# Altium PCB CON_REVD.PcbDoc
Units mm, origin at the board's own origin, x right, y up, seen from the top; angles counter-clockwise.
Board outline 95.88 x 101.01 mm, 2 copper layers (Top Layer, Bottom Layer), stack 1.556 mm thick; 4 components, 58 nets, 96 pads, 19 vias.
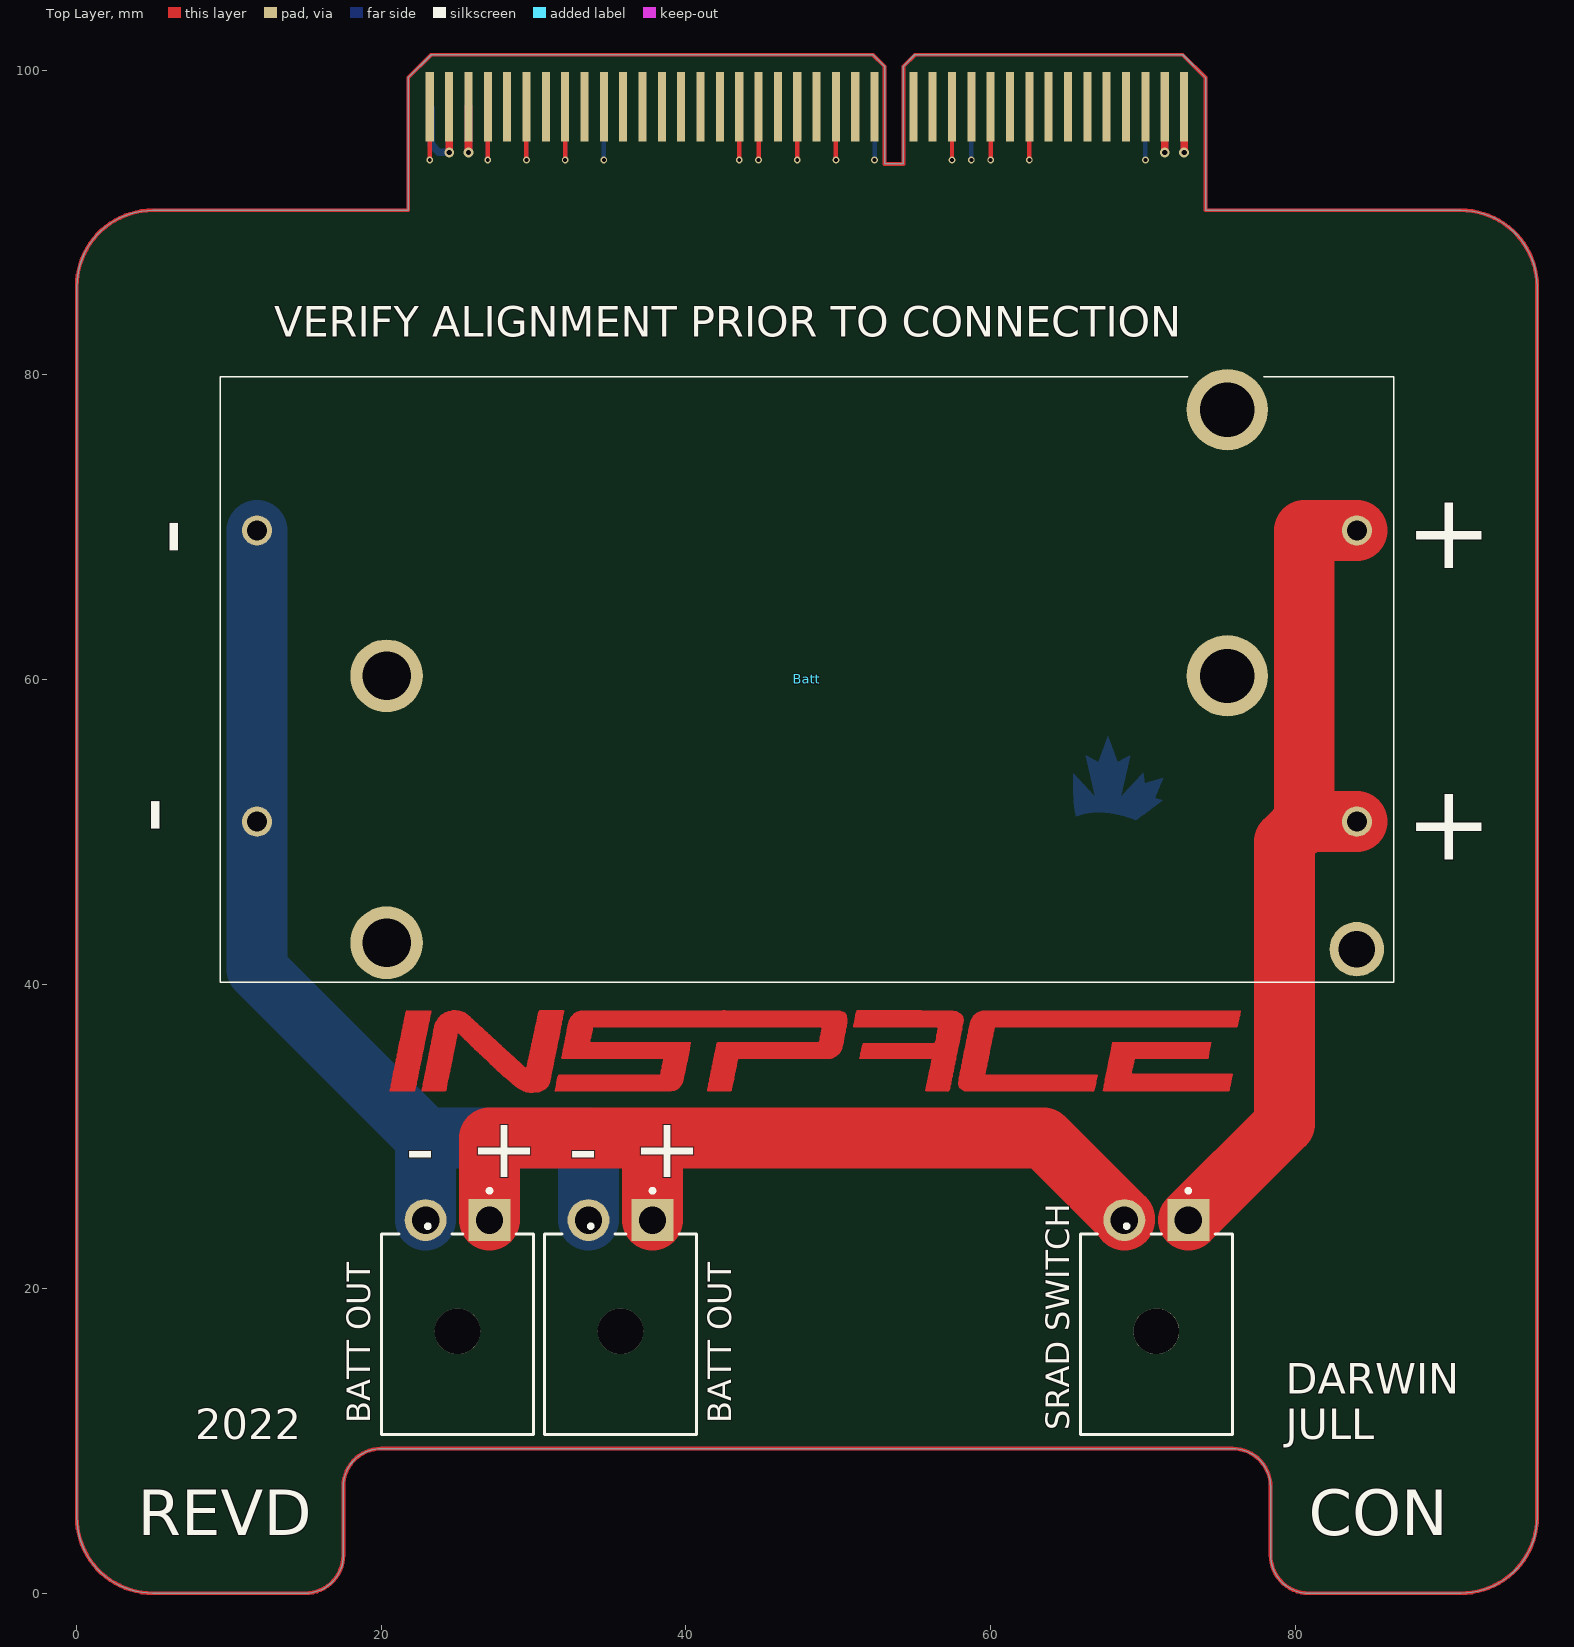
[diagram p0: Top Layer view]
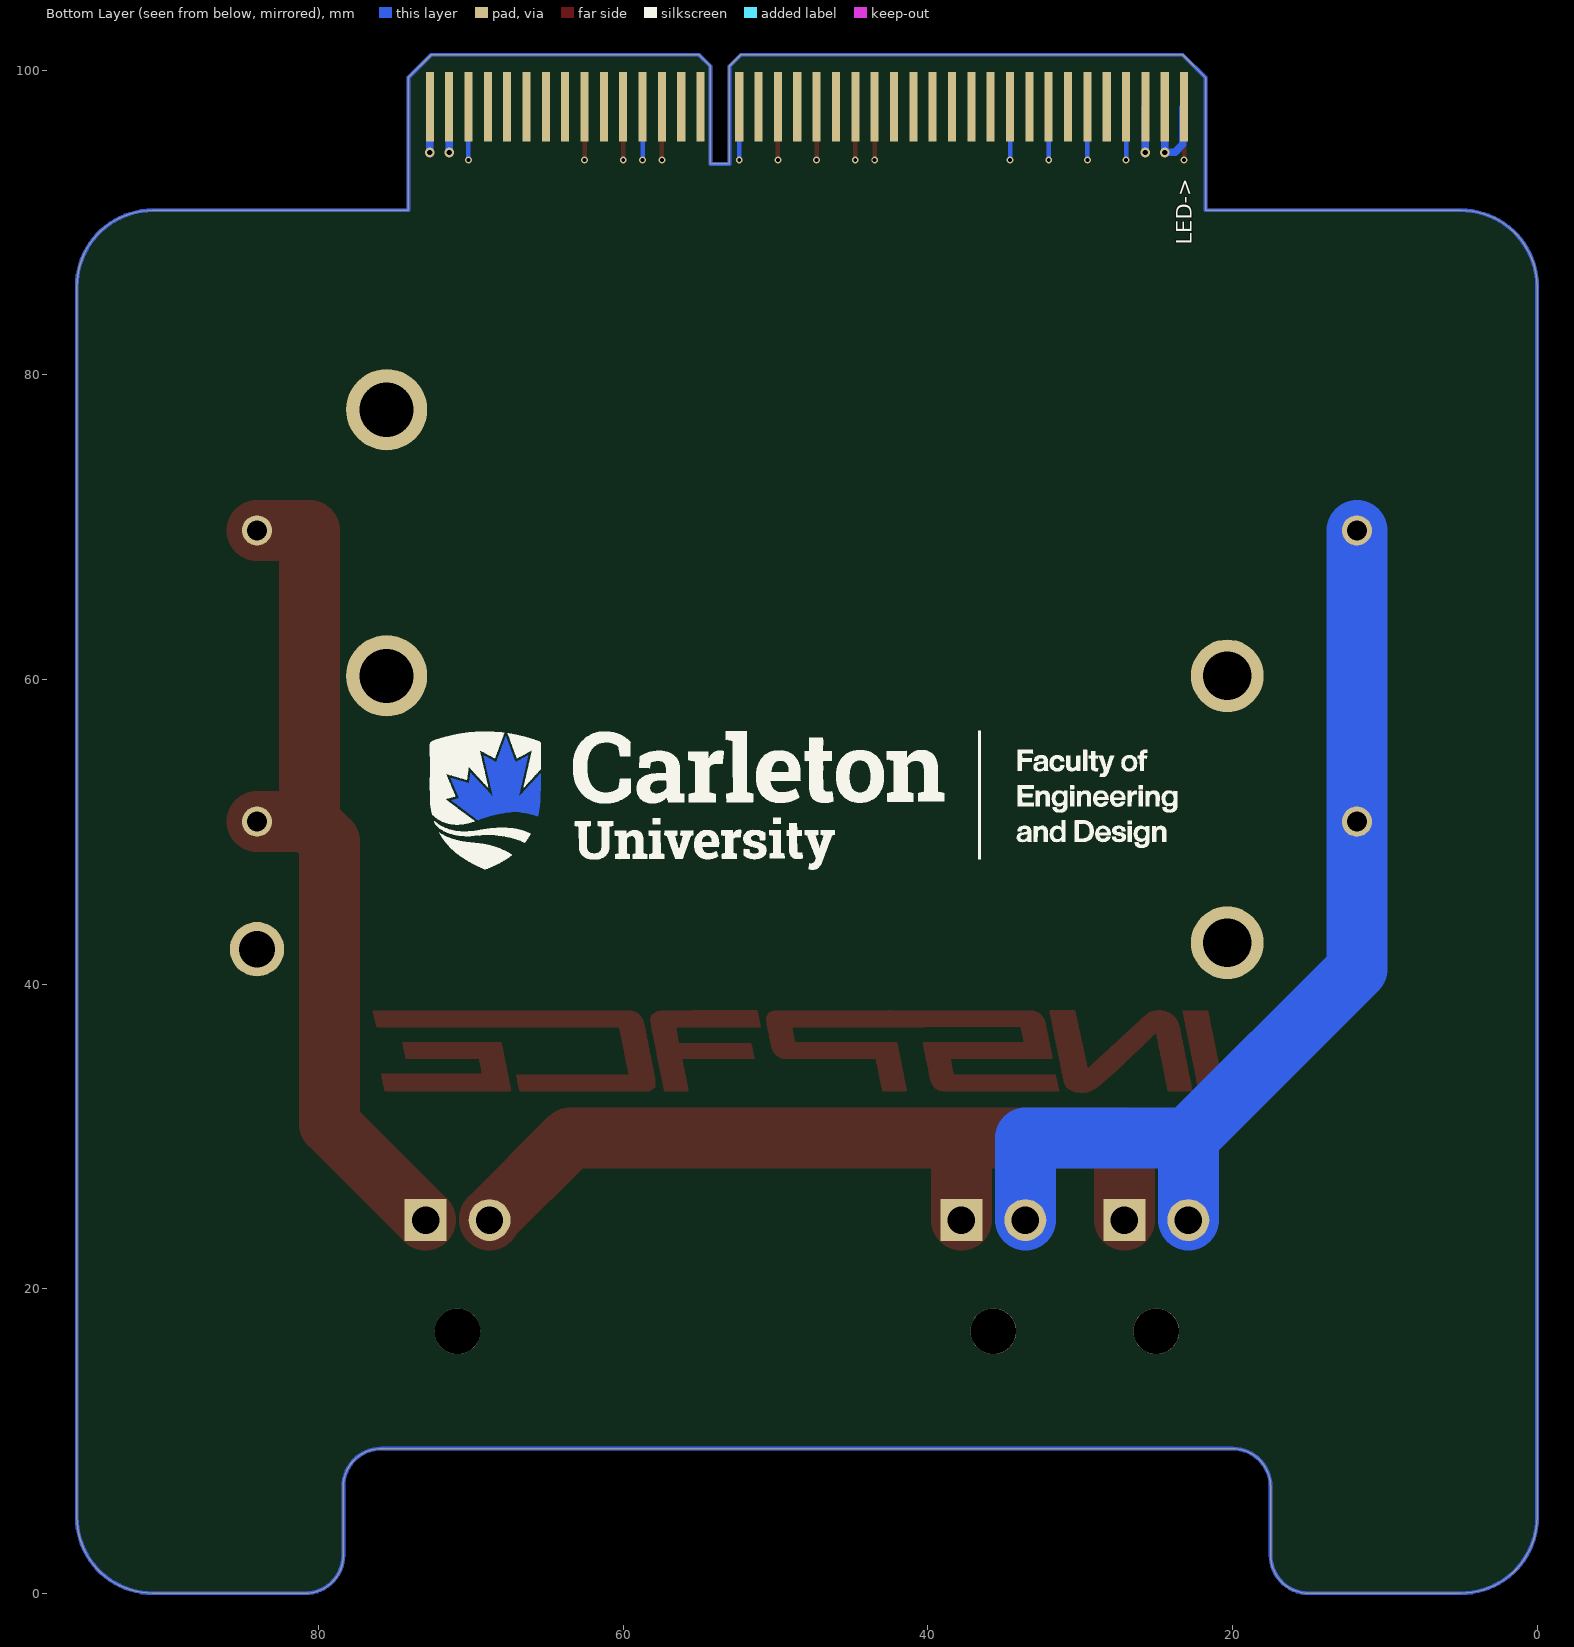
[diagram p1: Bottom Layer view, seen from below]
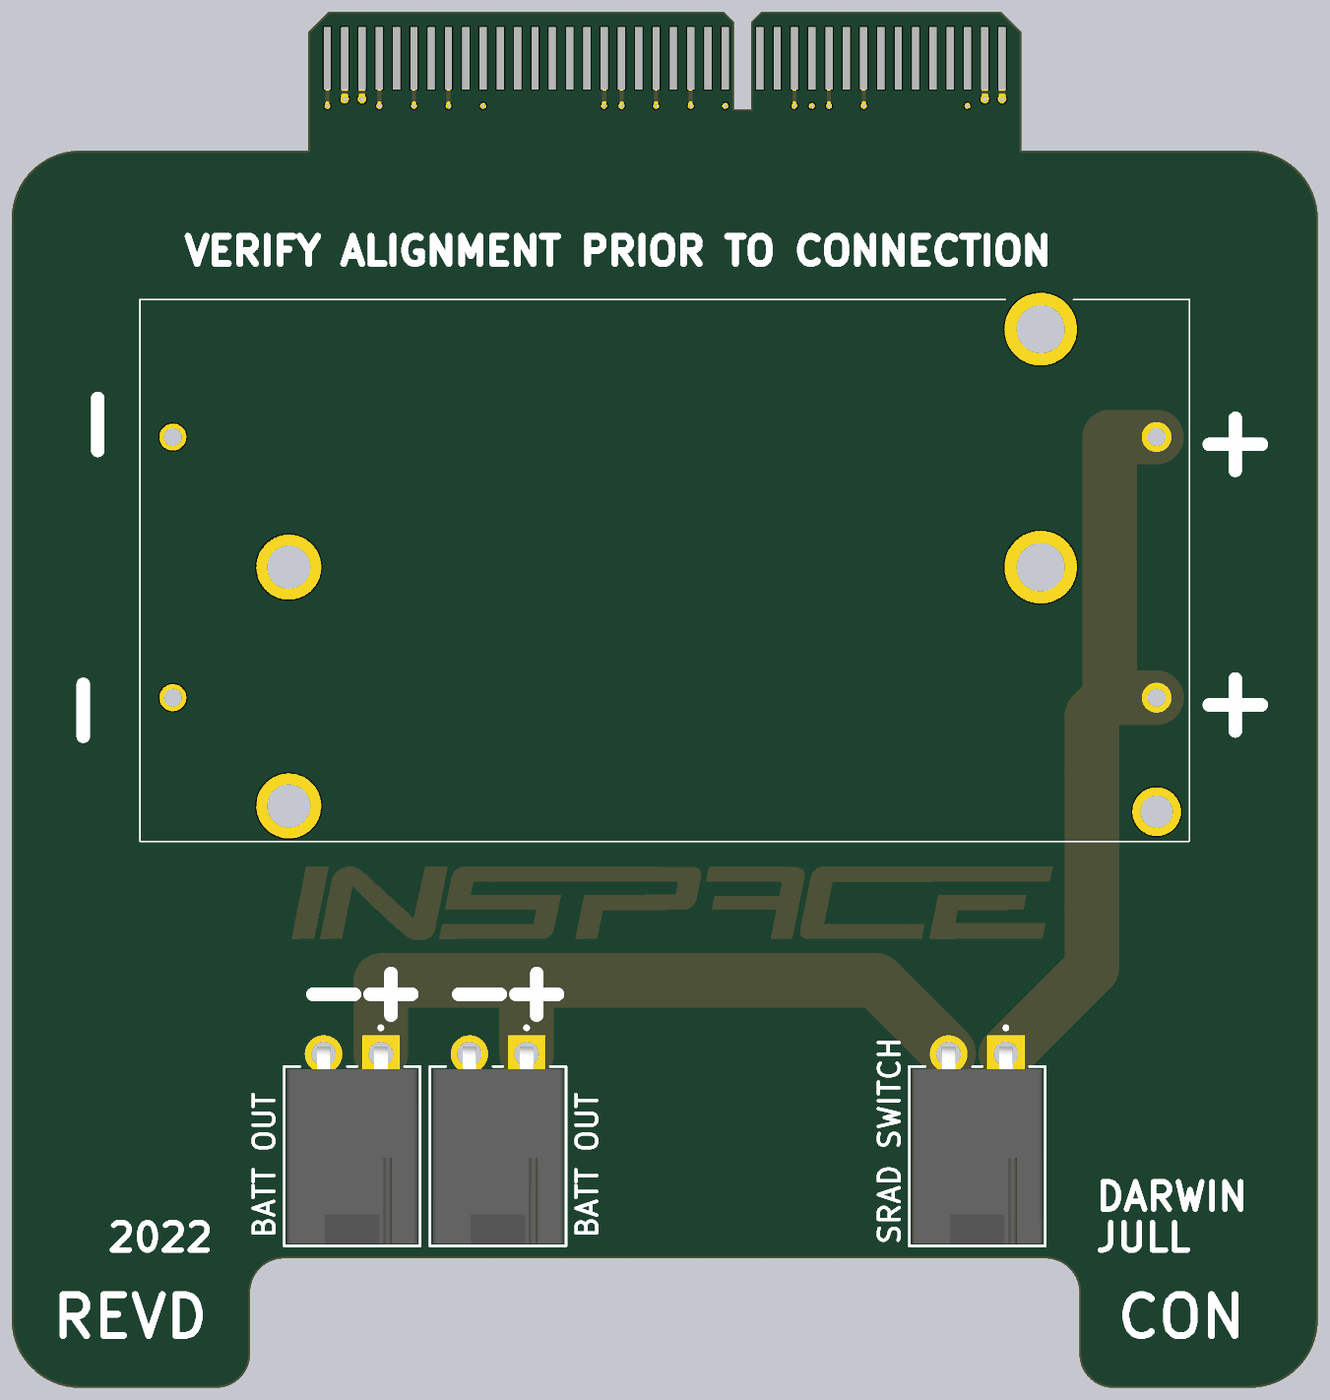
[diagram p2: 3D render of the assembled board from above, using the file's embedded part models]

## Layer stack, top to bottom
Top Solder: solder mask 0.0203, Solder Resist, Dk 3.8
Top Layer: signal copper 0.035
Dielectric 2: prepreg 0.2104, PP-006, Dk 4.6
Dielectric 1: dielectric 1.065, FR-4, Dk 4.6
Dielectric 3: prepreg 0.2104, PP-006, Dk 4.6
Bottom Layer: signal copper 0.035
Bottom Solder: solder mask 0.0203, Solder Resist, Dk 3.8

## Board outline
5,0 15,0 ccw(c15,2.5) 17.5,2.5 17.5,7 cw(c20,7) 20,9.5 75.885,9.5 cw(c75.885,7) 78.385,7 78.385,2.5 ccw(c80.885,2.5) 80.885,0 90.885,0 ccw(c90.885,5) 95.885,5 95.885,85.805 ccw(c90.885,85.805) 90.885,90.805 74.117,90.805 74.117,99.517 72.617,101.015 55.027,101.015 54.277,100.265 54.277,93.855 53.037,93.855 53.037,100.265 52.287,101.015 23.267,101.015 21.767,99.517 21.768,90.805 5,90.805 ccw(c5,85.805) 0,85.805 0,5 ccw(c5,5)

## Design rules (kind name [scope] priority, off if disabled: settings)
Clearance [All] p1: gap=0.254 ignorepadtopadclearanceinfootprint=TRUE except(0: Arc-Hole Track-Hole SMDPad-Hole THPad-Hole Via-Hole Fill-Hole Poly-Hole Region-Hole Text-Hole; 0.127: Arc-Arc Arc-Track Track-Track SMDPad-SMDPad THPad-THPad)
PlaneConnect [All] p1: pad.planeconnectstyle=Relief pad.reliefexpansion=0.508 pad.reliefentries=4 pad.reliefconductorwidth=0.254 pad.reliefairgap=0.254 via.planeconnectstyle=Direct via.reliefexpansion=0.508 via.reliefentries=4 via.reliefconductorwidth=0.254 via.reliefairgap=0.254
PolygonConnect [All] p1: connectstyle=Relief reliefconductorwidth=0.254 reliefentries=4 polygonreliefangle="90 Angle" airgapwidth=0.254
RoutingVias [All] p1: holewidth=0.254 width=0.445 viastyle="Through Hole" minholewidth=0.2 minwidth=0.4 maxholewidth=6.3 maxwidth=6.4
SolderMaskExpansion [All] p1: expansion=0.102 istentingtop=FALSE
Width [All] p1: maxlimit=8 minlimit=0.127 preferedwidth=0.293 minimp=50.000000 maximp=50.000000 favimp=50.000000
29 further rules are at their usual default settings.

## Components (designator, comment, footprint, x,y, rotation, side; value= is the part's Value field where it differs from the comment)
Batt "1049" 1049 47.942,60 r0 top locked
"BATT OUT" "172648-0102" FP-172648-0102-MFG 25,17 r0 top (schematic designator J?)
"BATT OUT" "172648-0102" FP-172648-0102-MFG 35.7,17 r0 top (schematic designator J?)
"SRAD SWITCH" "172648-0102" FP-172648-0102-MFG 70.885,17 r0 top locked (schematic designator J1)

## Footprints (in the part's own frame and the unit in brackets; to place one, negate y for a bottom-side part, rotate by r counter-clockwise, add the part's x,y. Pads: shape width x height; smd on the part's side, far side on the other; paste and mask are expansions set on the pad)
1049 [mm]
  round 4.77 hole 3.18: 1(-27.6,0.24) 2(-27.6,-17.29)
  round 5.325 hole 3.55: 3(27.6,0.24) 4(27.6,17.71)
  round 3.57 hole 2.38: 5(36.11,-17.71)
  round 1.98 hole 1.32: 6(-36.11,-9.34) 7(-36.11,9.79) 8(36.11,-9.34) 9(36.11,9.79)
  silkscreen extent -38.53,-19.89 38.53,19.89
FP-172648-0102-MFG [mm]
  rect 2.75x2.75 hole 1.8 paste-1000 mask+0: 1(2.1,7.5)
  round 2.75 hole 1.8 paste-1000 mask+0: 2(-2.1,7.5)
  round 3 hole 3 unplated paste-1000 mask+0: ""(0,0.2)
  silkscreen extent -4.99,-6.59 4.99,9.55, body extent -5.09,-6.69 5.09,8.98, height 0.25

## Part data
Batt: "KEYSTONE - 1049 - BATTERY HOLDER, 18650, THROUGH HOLE", Manufacturer_Name="Keystone Electronics", Mouser Part Number=534-1049, Datasheet Link=http://www.keyelco.com/product.cfm/product_id/921, Geometry.Height=14mm, Manufacturer_Part_Number=1049, Mouser Price/Stock=https://www.mouser.co.uk/ProductDetail/Keystone-Electronics/1049?qs=%2F7TOpeL5Mz78b0pqEFIl5w%3D%3D
"BATT OUT" "BATT OUT" "SRAD SWITCH": library part CMP-04776-000216-1, "CONN HEADER R/A 2POS 4.2MM"

## Free pads (board coordinates)
  rect 0.53x4.572 smd: 1(72.707,97.6) 3(71.437,97.6) 5(70.167,97.6) 7(68.897,97.6) 9(67.627,97.6) 11(66.357,97.6) 13(65.087,97.6) 15(63.817,97.6) 17(62.547,97.6) 19(61.277,97.6) 21(60.007,97.6) 23(58.737,97.6) 25(57.467,97.6) 27(56.197,97.6) 29(54.927,97.6) 31(52.387,97.6) 33(51.117,97.6) 35(49.847,97.6) 37(48.577,97.6) 39(47.307,97.6) 41(46.037,97.6) 43(44.767,97.6) 45(43.497,97.6) 47(42.227,97.6) 49(40.957,97.6) 51(39.687,97.6) 53(38.417,97.6) 55(37.147,97.6) 57(35.877,97.6) 59(34.607,97.6) 61(33.337,97.6) 63(32.067,97.6) 65(30.797,97.6) 67(29.527,97.6) 69(28.257,97.6) 71(26.987,97.6) 73(25.717,97.6) 75(24.447,97.6) 77(23.177,97.6)
  rect 0.53x4.572 smd far side: 2(72.707,97.6) 4(71.437,97.6) 6(70.167,97.6) 8(68.897,97.6) 10(67.627,97.6) 12(66.357,97.6) 14(65.087,97.6) 16(63.817,97.6) 18(62.547,97.6) 20(61.277,97.6) 22(60.007,97.6) 24(58.737,97.6) 26(57.467,97.6) 28(56.197,97.6) 30(54.927,97.6) 32(52.387,97.6) 34(51.117,97.6) 36(49.847,97.6) 38(48.577,97.6) 40(47.307,97.6) 42(46.037,97.6) 44(44.767,97.6) 46(43.497,97.6) 48(42.227,97.6) 50(40.957,97.6) 52(39.687,97.6) 54(38.417,97.6) 56(37.147,97.6) 58(35.877,97.6) 60(34.607,97.6) 62(33.337,97.6) 64(32.067,97.6) 66(30.797,97.6) 68(29.527,97.6) 70(28.257,97.6) 72(26.987,97.6) 74(25.717,97.6) 76(24.447,97.6) 78(23.177,97.6)

## Via types
v1: diameter 0.444, hole 0.254, Top Layer to Bottom Layer, 15 vias
v2: diameter 0.635, hole 0.356, Top Layer to Bottom Layer, 4 vias

## Nets (pads, with @x,y where several pads share a name; then routed paths per layer and width w, separated by ;. In a path a pad name is that pad's centre, name@x,y a point inside that pad or via, vN(x,y) a via of type N, cw(c..) or ccw(c..) an arc to the next point about the centre after c; other vN are vias at no path point)
+3.3V: pad.3 pad.4 pad.73 pad.74 pad.75 pad.76 pad.78 | length 21.9
  Top Layer w0.5: v2(24.447,94.6) pad.75 ; v2(25.717,94.6) pad.73 ; v2(71.437,94.6) pad.3
  Bottom Layer w0.5: pad.78 23.257,97.52 23.257,95.143 23.774,94.626 24.421,94.626 v2(24.447,94.6) pad.76 ; v2(25.717,94.6) pad.74 ; v2(71.437,94.6) pad.4
+5V: pad.1 pad.2 | length 6
  Top Layer w0.5: v2(72.707,94.6) pad.1
  Bottom Layer w0.5: v2(72.707,94.6) pad.2
A0: pad.22
A1: pad.20
A2: pad.18
A3: pad.16
A4: pad.14
A5: pad.12
A6: pad.10
A7: pad.8
A12: pad.31
A13: pad.33
Bat+: "BATT OUT.1" "SRAD SWITCH.2" | length 54.8
  Top Layer w4: 27.1,24.5 27.1,29.9 37.8,29.9 ; 37.8,24.5 37.8,29.9 ; 68.785,24.5 68.785,24.6 63.485,29.9 37.8,29.9
Bat-: "BATT OUT.2" Batt.6 Batt.7 | length 66
  Bottom Layer w4: Batt.7 Batt.6 11.833,40.967 22.9,29.9 ; 22.9,24.5 22.9,29.9 ; 33.6,24.5 33.6,29.9 22.9,29.9
DAC0: pad.41
DAC1: pad.37
GND: pad.6 pad.17 pad.21 pad.24 pad.25 pad.32 pad.35 pad.39 pad.43 pad.45 pad.60 pad.63 pad.64 pad.67 pad.68 pad.71 pad.72 pad.77 | length 63
  Top Layer w0.293: v1(23.177,94.1) pad.77 ; v1(26.987,94.1) pad.71 ; v1(29.527,94.1) pad.67 ; v1(32.067,94.1) pad.63 ; v1(43.497,94.1) pad.45 ; v1(44.767,94.1) pad.43 ; v1(47.307,94.1) pad.39 ; v1(49.847,94.1) pad.35 ; v1(57.467,94.1) pad.25 ; v1(60.007,94.1) pad.21 ; v1(62.547,94.1) pad.17
  Bottom Layer w0.293: v1(26.987,94.1) pad.72 ; v1(29.527,94.1) pad.68 ; v1(32.067,94.1) pad.64 ; v1(34.607,94.1) pad.60 ; v1(52.387,94.1) pad.32 ; v1(58.737,94.1) pad.24 ; v1(70.167,94.1) pad.6
GPIO0: pad.58
GPIO1: pad.56
GPIO2: pad.54
GPIO3: pad.52
GPIO4: pad.50
GPIO5: pad.48
GPIO6: pad.46
GPIO7: pad.44
GPIO8: pad.42
GPIO9: pad.40
GPIO10: pad.38
GPIO11: pad.36
GPIO12: pad.34
GPIO13: pad.30
GPIO14: pad.28
GPIO15: pad.26
GPIO22: pad.27
GPIO23: pad.29
I2C0_SCL: pad.69
I2C0_SDA: pad.65
I2C1_SCL: pad.23
I2C1_SDA: pad.19
NetB?_1: 
PORT0: pad.15
PORT1: pad.13
PORT2: pad.11
PORT3: pad.9
PORT4: pad.7
PORT5: pad.5
SPI_MISO: pad.62
SPI_MOSI: pad.66
SPI_SCK: pad.70
SWITCH+: "SRAD SWITCH.1" Batt.8 Batt.9 | length 55.3
  Top Layer w4: 72.985,24.5 79.3,30.815 79.3,49.36 80.6,50.66 ; Batt.8 80.6,50.66 ; Batt.9 80.6,69.79 80.6,50.66
UART0_RX: pad.61
UART0_TX: pad.59
UART1_RX: pad.57
UART1_TX: pad.55
UART2_RX: pad.53
UART2_TX: pad.51
UART3_RX: pad.49
UART3_TX: pad.47
pads on no net: "BATT OUT." "SRAD SWITCH." Batt.1 Batt.2 Batt.3 Batt.4 Batt.5

## Other copper
Top Layer:
  region: 73.945,32.951 67.417,32.943 67.368,32.976 67.384,33.106 67.4,33.155 67.417,33.22 67.433,33.333 67.457,33.472 67.482,33.561 67.498,33.626 67.514,33.74 67.539,33.878 67.563,33.968 67.579,34.033 67.62,34.268 67.644,34.358 67.661,34.423 67.685,34.61 67.701,34.675 67.726,34.764 67.742,34.829 67.766,35.016 67.807,35.154 67.823,35.268 67.848,35.406 67.864,35.471 67.888,35.561 67.929,35.813 67.953,35.902 67.97,35.967 68.002,36.162 68.075,36.187 74.481,36.171 74.489,36.097 74.473,36.049 74.457,35.984 74.441,35.805 74.408,35.723 74.392,35.61 74.376,35.545 74.359,35.398 74.327,35.317 74.311,35.203 74.294,35.106 74.221,35.081 69.473,35.065 69.449,34.976 69.425,34.87 69.4,34.78 69.384,34.667 69.36,34.545 69.343,34.48 69.319,34.39 69.287,34.163 69.327,34.122 75.863,34.106 75.888,34.081 75.863,33.927 75.847,33.797 75.831,33.732 75.806,33.642 75.79,33.577 75.766,33.39 75.741,33.301 75.709,33.171 75.693,33.008 75.636,32.951 73.961,32.951
  region: 60.181,36.78 60.165,36.569 60.149,36.52 60.116,36.406 60.084,36.179 60.035,36.016 60.019,35.902 59.994,35.764 59.97,35.675 59.954,35.61 59.938,35.447 59.905,35.333 59.873,35.203 59.832,34.967 59.808,34.878 59.791,34.813 59.767,34.626 59.742,34.537 59.71,34.407 59.686,34.22 59.645,34.114 59.669,34.057 59.783,34.041 66.994,34.049 67.027,34.016 67.01,33.854 66.978,33.772 66.953,33.569 66.929,33.48 66.896,33.35 66.856,33.114 66.807,32.984 66.791,32.951 66.726,32.935 66.661,32.951 58.271,32.968 58.06,33.081 57.938,33.203 57.905,33.285 57.889,33.447 57.905,33.789 57.921,33.837 57.938,33.968 57.97,34.049 57.987,34.163 58.011,34.317 58.035,34.407 58.068,34.537 58.084,34.699 58.1,34.748 58.133,34.862 58.149,34.976 58.173,35.114 58.198,35.203 58.214,35.268 58.255,35.504 58.287,35.634 58.304,35.732 58.336,35.91 58.36,36 58.377,36.065 58.401,36.252 58.417,36.317 58.442,36.406 58.458,36.471 58.474,36.65 58.507,36.732 58.523,36.797 58.539,36.959 58.572,37.089 58.604,37.203 58.621,37.366 58.678,37.52 58.694,37.601 58.726,37.683 58.751,37.707 58.783,37.788 58.816,37.821 58.832,37.853 58.905,37.943 59.019,38.057 59.051,38.073 59.1,38.122 59.182,38.154 59.214,38.187 59.344,38.219 59.434,38.244 59.531,38.26 76.4,38.268 76.44,38.227 76.408,38.032 76.384,37.927 76.343,37.788 76.327,37.675 76.302,37.569 76.262,37.431 76.229,37.219 76.172,37.162 76.107,37.146 60.287,37.13 60.263,37.106 60.247,37.04 60.23,36.91 60.198,36.829 60.19,36.788
  region: 55.442,38.268 57.556,38.252 57.637,38.219 57.767,38.203 57.978,38.089 58.011,38.057 58.043,38.04 58.149,37.935 58.165,37.87 58.198,37.837 58.214,37.772 58.23,37.658 58.214,37.398 58.182,37.317 58.157,37.211 58.141,37.081 58.125,36.984 58.084,36.845 58.068,36.732 58.043,36.593 58.019,36.504 58.003,36.439 57.962,36.203 57.93,36.073 57.913,35.976 57.881,35.797 57.856,35.707 57.84,35.642 57.816,35.455 57.791,35.366 57.759,35.236 57.734,35.049 57.694,34.911 57.678,34.748 57.661,34.683 57.629,34.569 57.613,34.504 57.596,34.341 57.58,34.276 57.548,34.163 57.531,34.098 57.507,33.927 57.491,33.862 57.466,33.772 57.45,33.707 57.426,33.52 57.409,33.455 57.385,33.366 57.369,33.301 57.344,33.114 57.296,32.984 57.263,32.951 57.198,32.935 57.149,32.951 55.775,32.943 55.727,32.976 55.743,33.203 55.775,33.285 55.792,33.35 55.808,33.463 55.832,33.602 55.857,33.691 55.873,33.756 55.913,33.992 55.938,34.081 55.954,34.146 55.979,34.317 56.027,34.512 56.06,34.724 56.076,34.789 56.1,34.878 56.117,34.992 56.133,35.041 56.092,35.081 51.41,35.098 51.385,35.138 51.418,35.219 51.434,35.284 51.459,35.471 51.499,35.61 51.515,35.723 51.54,35.862 51.564,35.951 51.597,36.081 51.637,36.122 51.8,36.106 56.214,36.114 56.304,36.106 56.344,36.13 56.385,36.317 56.418,36.447 56.434,36.577 56.45,36.675 56.466,36.74 56.491,36.829 56.507,36.943 56.523,37.073 56.499,37.114 56.385,37.146 51.003,37.162 50.979,37.187 50.995,37.333 51.011,37.382 51.044,37.512 51.068,37.699 51.093,37.788 51.109,37.853 51.125,37.967 51.15,38.105 51.198,38.236 51.215,38.268 55.426,38.268
  region: 218 vertices and 0 holes, not listed, extent 31.387,32.935 50.605,38.284
  region: 335 vertices and 0 holes, not listed, extent 22.639,32.854 32.005,38.276
  region: 20.721,33.854 20.737,33.951 20.753,34 20.794,34.252 20.818,34.341 20.835,34.407 20.875,34.642 20.9,34.732 20.916,34.797 20.94,34.984 20.957,35.049 20.981,35.138 20.997,35.203 21.022,35.39 21.062,35.528 21.079,35.642 21.103,35.78 21.119,35.845 21.144,35.935 21.184,36.187 21.209,36.276 21.225,36.341 21.266,36.577 21.298,36.707 21.331,36.919 21.347,36.984 21.371,37.073 21.388,37.138 21.412,37.325 21.453,37.463 21.469,37.577 21.485,37.707 21.501,37.756 21.534,37.87 21.55,37.983 21.574,38.122 21.623,38.252 21.672,38.268 23.257,38.26 23.274,38.195 23.257,38.13 23.241,38 23.209,37.918 23.176,37.691 23.16,37.626 23.127,37.512 23.111,37.398 23.087,37.26 23.07,37.195 23.046,37.106 23.03,36.992 23.005,36.853 22.981,36.764 22.965,36.699 22.948,36.585 22.924,36.463 22.908,36.398 22.883,36.309 22.859,36.122 22.843,36.057 22.818,35.967 22.802,35.902 22.778,35.715 22.737,35.577 22.721,35.463 22.696,35.325 22.68,35.26 22.656,35.171 22.639,35.057 22.615,34.919 22.591,34.829 22.574,34.764 22.558,34.65 22.534,34.528 22.518,34.463 22.493,34.374 22.469,34.187 22.452,34.122 22.428,34.033 22.412,33.968 22.387,33.781 22.363,33.691 22.331,33.561 22.314,33.398 22.298,33.35 22.266,33.236 22.233,33.008 22.176,32.951 20.591,32.943 20.558,32.959 20.542,33.024 20.558,33.09 20.575,33.138 20.607,33.268 20.623,33.431 20.64,33.48 20.672,33.594 20.688,33.707 20.713,33.846
Bottom Layer:
  region: 824 vertices and 0 holes, not listed, extent 65.425,50.765 71.329,56.26
Multi-Layer:
  the board outline again, w0.254

## Silkscreen, mask and mechanical layers (free items; w line width, h text height)
Top Overlay:
  text "VERIFY ALIGNMENT PRIOR TO CONNECTION" at 12.954,82.5 h2
  text "-" at 8.284,68.124 h5 r90
  text "+" at 87.234,67.291 h5
  text "-" at 3.286,52.326 h5 r270
  text "+" at 87.234,48.161 h5
  text "-" at 21.567,27.301 h4
  text "+" at 25.767,27.301 h4
  text "-" at 32.267,27.301 h4
  text "+" at 36.467,27.301 h4
  text "DARWIN" at 79.385,13.1 h2
  text "2022" at 7.769,10.1 h2
  text "JULL" at 79.385,10.1 h2
  text "REVD" at 3.996,3.808 h3
  text "CON" at 80.893,3.808 h3
Bottom Overlay:
  drawing of 57 lines, arcs and shapes, not listed
  text "LED->" at 22.677,88.554 h1 r270